# Altium PCB Probe.PcbDoc (part 1 of 2)
Units mm, origin at the board's own origin, x right, y up, seen from the top; angles counter-clockwise.
Board outline 70 x 20 mm, 4 copper layers (Top, Ground, Signal/Power, Bottom), stack 1.516 mm thick; 57 components, 31 nets, 156 pads, 262 vias.
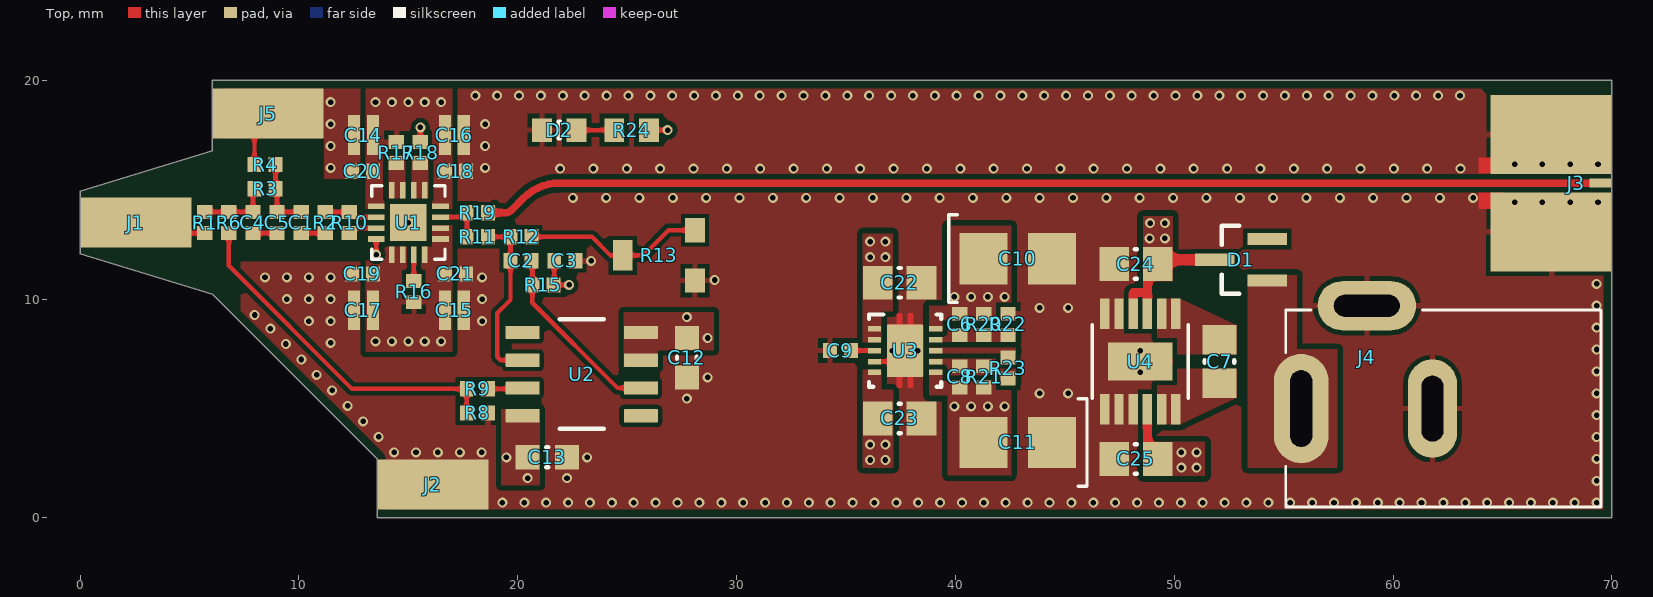
[diagram p0: Top view]
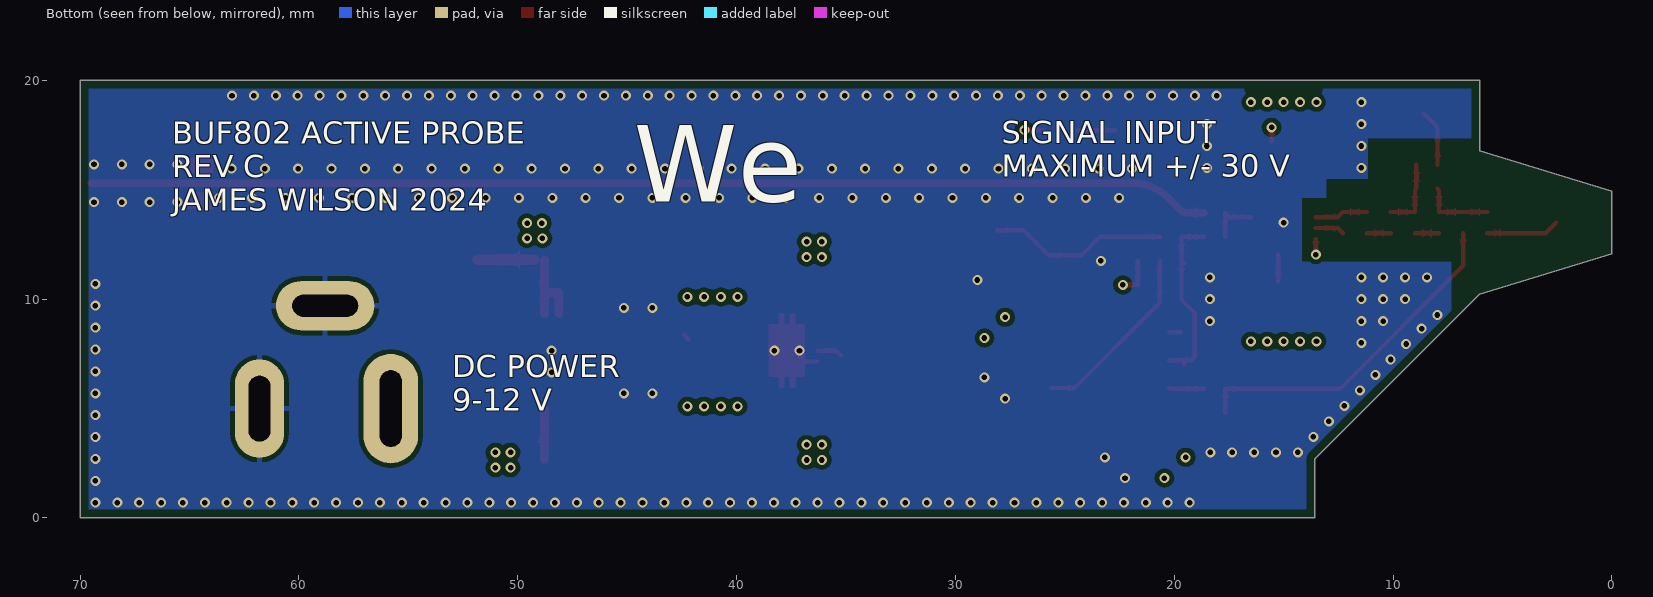
[diagram p1: Bottom view, seen from below]
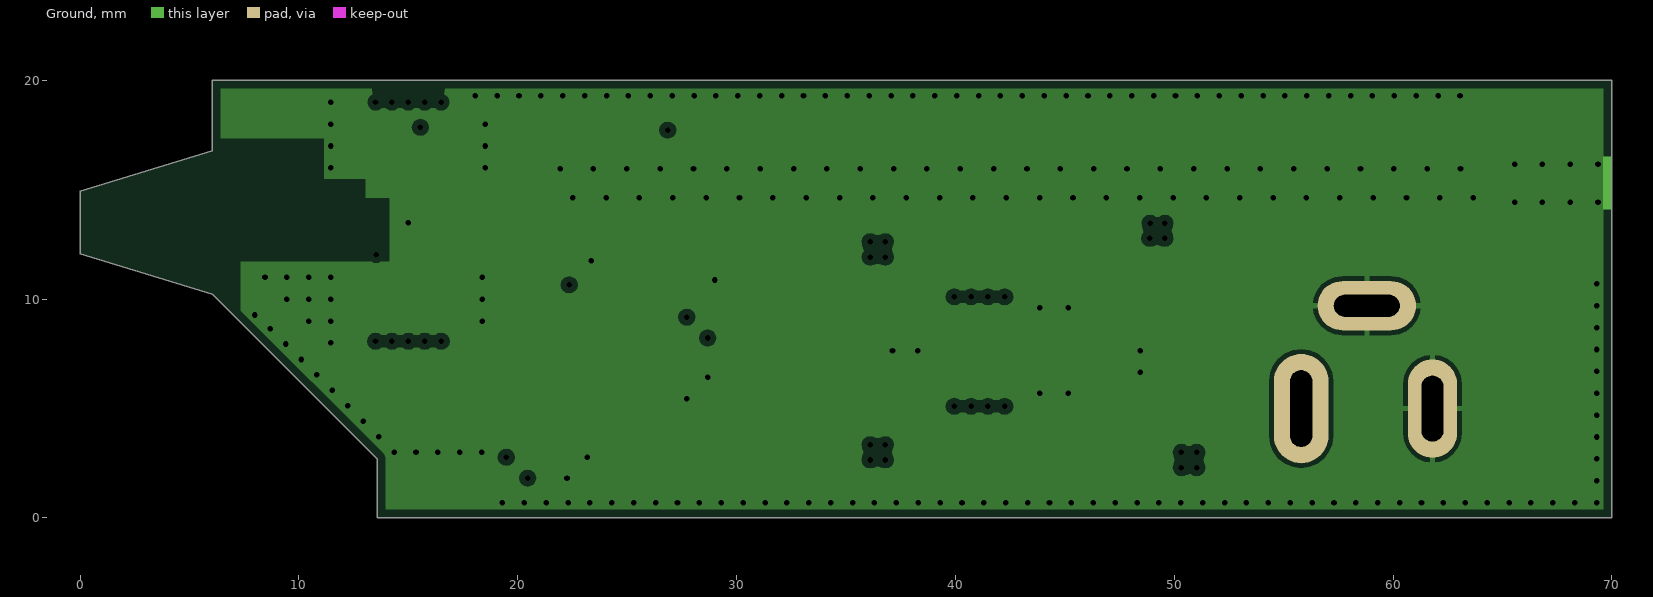
[diagram p2: Ground]
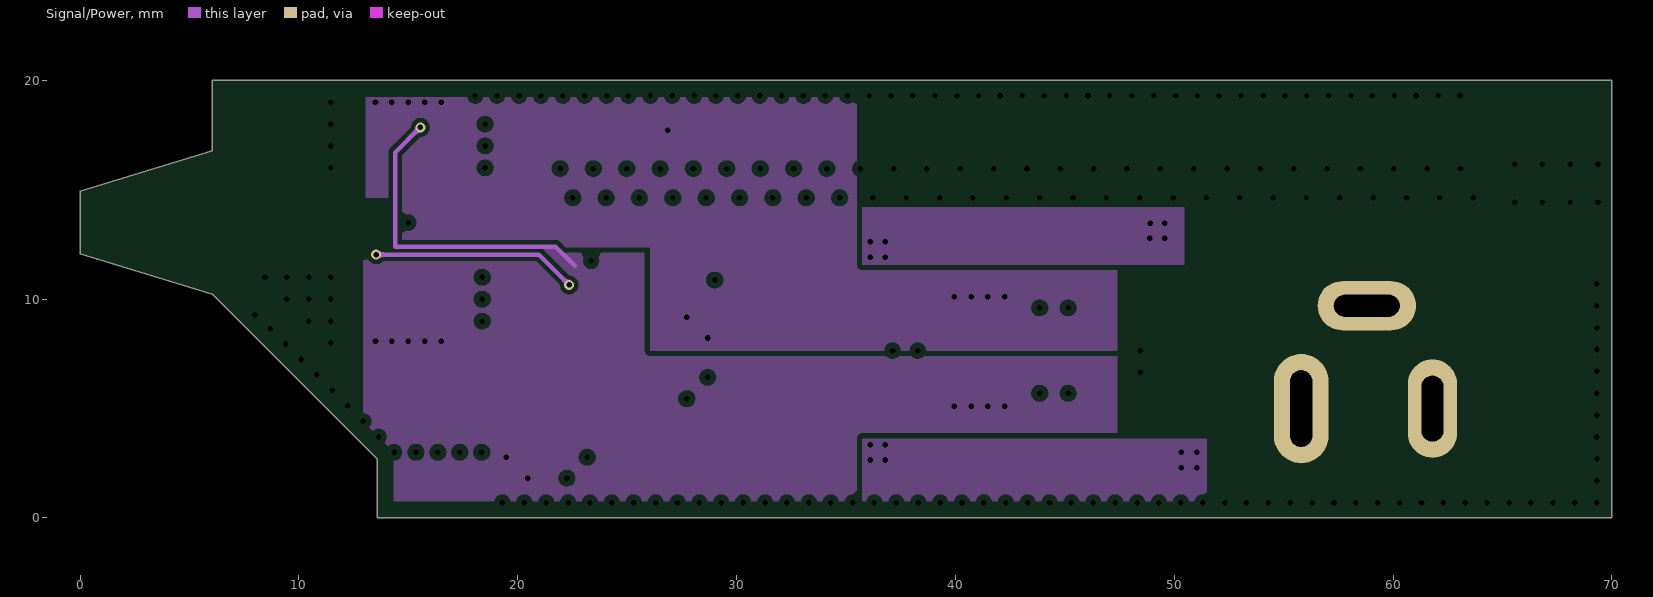
[diagram p3: Signal/Power]
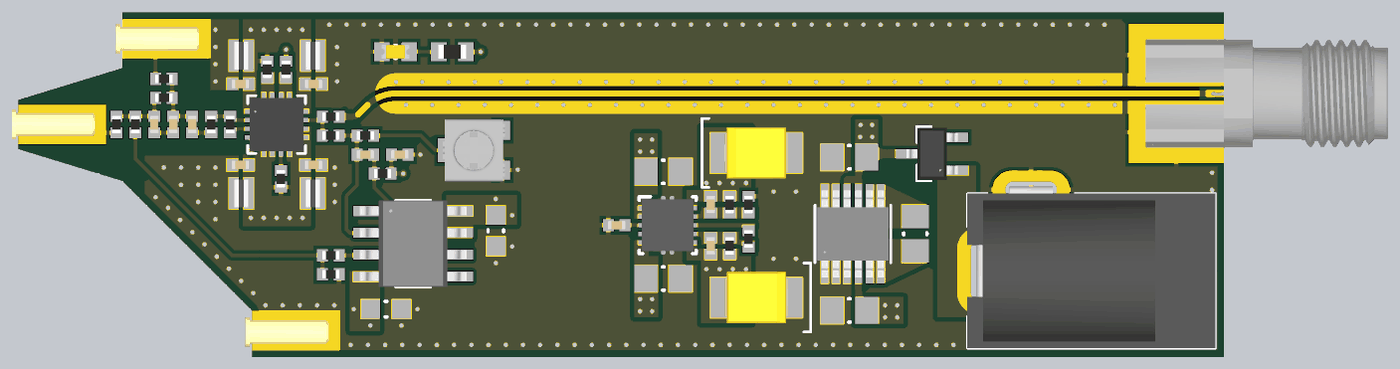
[diagram p4: 3D render of the assembled board from above, using the file's embedded part models]

## Layer stack, top to bottom
Top Solder: solder mask 0.0254, Solder Resist, Dk 3.5
Top: signal copper 0.0432
Dielectric 1: core 0.2022, FR-4, Dk 3.68
Ground: signal copper 0.0173
Dielectric 3: core 0.9906, Dk 3.68
Signal/Power: signal copper 0.0173
Dielectric 4: prepreg 0.2022, Dk 3.68
Bottom: signal copper 0.0432
Bottom Solder: solder mask 0.0254, Solder Resist, Dk 3.5

## Board outline
0,12.077 0,14.923 6.05,16.775 6.05,20 70,20 70,0 13.575,0 13.575,2.7 6.05,10.225

## Design rules (kind name [scope] priority, off if disabled: settings)
BoardOutlineClearance BoardOutlineClearance_outer [OnCopper and OnOutside] p1: gap=0.381 ignorepadtopadclearanceinfootprint=FALSE except(0: SMDPad-OutlineEdge)
BoardOutlineClearance BoardOutlineClearance_L3 [OnLayer('Signal/Power')] p2: gap=0.762 ignorepadtopadclearanceinfootprint=FALSE
BoardOutlineClearance BoardOutlineClearance_inner [OnCopper and not OnOutside] p3: gap=0.381 ignorepadtopadclearanceinfootprint=FALSE except(0: Fill-OutlineEdge Region-OutlineEdge)
Clearance Clearance_RF_CPWG [InNet('OUT') vs InNet('GND')] p1: gap=0.152 ignorepadtopadclearanceinfootprint=FALSE except(0.254: Arc-Fill Arc-Poly Arc-Region Track-Fill Track-Poly Track-Region Fill-Fill Fill-Poly Fill-Region Poly-Poly Poly-Region Region-Region)
Clearance [All] p2: gap=0.152 ignorepadtopadclearanceinfootprint=FALSE except(0.203: Arc-Poly Track-Poly SMDPad-Poly THPad-Poly Via-Poly; 0.254: Arc-Hole Track-Hole SMDPad-Hole THPad-Hole Via-Hole Fill-Fill Fill-Poly Fill-Region Fill-Hole Poly-Poly Poly-Hole Region-Hole)
HoleSize [All] p1: absolutevalues=TRUE maxlimit=6.35 minlimit=0.254 maxpercent=80.000 minpercent=20.000
MinimumSolderMaskSliver [All] p1: minsoldermaskwidth=0.102
PlaneConnect [All] p1: planeconnectstyle=Direct reliefexpansion=0.508 reliefentries=4 reliefconductorwidth=0.254 reliefairgap=0.254
PolygonConnect PolygonConnect_Relief [InComponentClass('Power plane relief') vs InNet('GND') OR InNet('VEE') OR InNet('VCC')] p1: connectstyle=Relief reliefconductorwidth=0.254 reliefentries=4 polygonreliefangle="90 Angle" airgapwidth=0.203
PolygonConnect [All] p2: connectstyle=Direct reliefconductorwidth=0.254 reliefentries=4 polygonreliefangle="90 Angle" airgapwidth=0.254
RoutingVias [All] p1: holewidth=0.457 width=0.457 viastyle="Through Hole" minholewidth=0.203 minwidth=0.457 maxholewidth=0.711 maxwidth=1.27
SilkToSolderMaskClearance [IsPad] p1: minsilkscreentomaskgap=0.127 clearancetoexposedcopper=TRUE
SolderMaskExpansion [All] p1: expansion=0.051
Width [All] p1: maxlimit=5.08 minlimit=0.102 preferedwidth=0.254
26 further rules are at their usual default settings.

## Classes and differential pairs
component class "Power plane relief": C3 C9 D2 J3 J4 R8 R13 R16 R17 R18 R22
net class Power: GND V+ V- VCC VEE
component class Power: C6 C7 C8 C9 C10 C11 C12 C13 C14 C15 C16 C17 C18 C19 C20 C21 C22 C23 C24 C25 D1 D2 J4 R20 R21 R22 R23 R24 U3 U4
component class Probe: C1 C2 C3 C4 C5 J1 J2 J3 J5 R1 R2 R3 R4 R6 R8 R9 R10 R11 R12 R13 R15 R16 R17 R18 R19 U1 U2

## Components (designator, comment, footprint, x,y, rotation, side; value= is the part's Value field where it differs from the comment)
C1 "330p" CAPC0402(1005)50_M 10.1,13.5 r270 top
C2 "47p" CAPC0402(1005)50_M 20.15,11.75 r0 top
C3 "100p" CAPC0402(1005)50_M 22.15,11.75 r0 top
C4 "1.1p" CAPC0402(1005)50_M 7.9,13.5 r270 top
C5 "1.3p" CAPC0402(1005)50_M 9,13.5 r90 top
C6 "10n" CAPC0402(1005)50_M 40.2,8.85 r90 top
C7 "1u" CAPC0805(2012)145_M 52.075,7.15 r270 top
C8 "10n" CAPC0402(1005)50_M 40.2,6.45 r270 top
C9 "10n" CAPC0402(1005)50_M 34.742,7.65 r180 top
C10 "22u" "KEMET B_M" 42.85,11.85 r180 top
C11 "22u" "KEMET B_M" 42.85,3.45 r0 top
C12 "100n" CAPC0603(1608)100_M 27.725,7.325 r270 top
C13 "100n" CAPC0603(1608)100_M 21.35,2.775 r180 top
C14 "100n LICC" CAPC0306_M 12.95,17.5 r180 top
C15 "100n LICC" CAPC0306_M 17.1,9.5 r180 top
C16 "100n LICC" CAPC0306_M 17.1,17.5 r0 top
C17 "100n LICC" CAPC0306_M 12.95,9.5 r0 top
C18 "10n" CAPC0402(1005)50_M 17.15,15.85 r0 top
C19 "10n" CAPC0402(1005)50_M 12.9,11.15 r0 top
C20 "10n" CAPC0402(1005)50_M 12.9,15.85 r180 top
C21 "10n" CAPC0402(1005)50_M 17.15,11.15 r180 top
C22 "4.7u" CAPC0805(2012)100_M 37.45,10.75 r0 top
C23 "4.7u" CAPC0805(2012)100_M 37.45,4.55 r180 top
C24 "4.7u" CAPC0805(2012)100_M 48.25,11.6 r180 top
C25 "4.7u" CAPC0805(2012)100_M 48.25,2.7 r180 top
D1 "BAT54" INF-PG-SC59_M 53.05,11.8 r180 top
D2 "VLMTG1300-GS08" LED0603(1608)_M 21.9,17.725 r0 top
J1 "0339-0-15-01-15-27-10-0" "MILL-MAX 0339"#1 0,13.5 r0 top
J2 "0339-0-15-01-15-27-10-0" "MILL-MAX 0339"#2 13.575,1.45 r0 top
J3 "901-10511-3" 901-10511-3 70,15.3 r180 top
J4 "2.1/5.5mm" "CUI PJ-002A" 55.8,5 r0 top
J5 "0339-0-15-01-15-27-10-0" "MILL-MAX 0339"#1 6.05,18.476 r0 top
R1 "100" RESC0402(1005)_M 5.7,13.5 r90 top
R2 "0" RESC0402(1005)_M 11.2,13.5 r90 top
R3 "1.60M" RESC0402(1005)_M 8.45,15.05 r0 top
R4 "422K" RESC0402(1005)_M 8.45,16.15 r180 top
R6 "1.91M" RESC0402(1005)_M 6.8,13.5 r270 top
R8 "66.5k" RESC0402(1005)_M 18.15,4.8 r0 top value=66.5K
R9 "68" RESC0402(1005)_M 18.15,5.9 r0 top
R10 "10.0M" RESC0402(1005)_M 12.3,13.5 r270 top
R11 "51.0K" RESC0402(1005)_M 18.15,12.85 r180 top
R12 "10.0K" RESC0402(1005)_M 20.15,12.85 r0 top
R13 "1k" PVG3A 26.45,12 r90 top
R15 "5.60K" RESC0402(1005)_M 21.15,10.65 r180 top
R16 "17.8k" RESC0402(1005)_M 15.25,10.342 r270 top value=17.8K
R17 "1.00K" RESC0402(1005)_M 14.45,16.7 r90 top
R18 "1.00K" RESC0402(1005)_M 15.55,16.7 r90 top
R19 "49.9" RESC0402(1005)_M 18.15,13.95 r0 top
R20 "41.2k" RESC0402(1005)_M 41.3,8.85 r270 top value=41.2K
R21 "91.0K" RESC0402(1005)_M 41.3,6.45 r270 top
R22 "10.2k" RESC0402(1005)_M 42.4,8.85 r90 top value=10.2K
R23 "18.0K" RESC0402(1005)_M 42.4,6.85 r90 top
R24 "4.70K" RESC0603(1608)_M 25.2,17.725 r180 top
U1 "BUF802" "VQFN16_RGT_TEX- OSHPARK" 15,13.5 r0 top
U2 "OPA140" SOIC-8 22.925,6.575 r0 top
U3 "TPS7A39" DSC0010J_NV 37.7,7.65 r0 top
U4 "LTC3261" MSOP-12_MSE 48.45,7.15 r90 top

## Footprints (in the part's own frame and the unit in brackets; to place one, negate y for a bottom-side part, rotate by r counter-clockwise, add the part's x,y. Pads: shape width x height; smd on the part's side, far side on the other; paste and mask are expansions set on the pad)
901-10511-3 [mil] "901-10511-3"
  rect 40x16 smd paste-1000: 1(20,0)
  rect 218x142 smd paste-1000: 2(109,87.79) 2(109,-87.75)
  body extent -375,-124 179,124, height 127
CAPC0306_M [mm] "CAPC0306(0510)_M"
  rect 0.56x1.81 smd: 1(-0.43,0) 2(0.43,0)
  body extent -0.4,-0.8 0.4,0.8, height 0.55
CAPC0402(1005)50_M [mm] "Chip Capacitor, Body 1.0x0.5mm, Height 0.5mm, IPC Low  Density"
  rect 0.635x0.7 smd: 1(-0.483,0) 2(0.483,0)
  body extent -0.5,-0.25 0.5,0.25, height 0.5
CAPC0603(1608)100_M [mm] "Chip Capacitor, Body 1.6x0.8mm, Height 1.0mm, IPC Low Density"
  rect 1.1x1.1 smd: 1(-0.9,0) 2(0.9,0)
  silkscreen extent -0.05,-0.45 0.05,0.45, body extent -0.87,-0.48 0.88,0.48, height 1
CAPC0805(2012)100_M [mm] "Chip Capacitor, Body 2.0x1.2mm, Height 1.0mm, IPC Low Density"
  rect 1.35x1.55 smd: 1(-1,0) 2(1,0)
  silkscreen extent -0.05,-0.67 0.05,0.67, body extent -1.1,-0.72 1.1,0.72, height 1
CAPC0805(2012)145_M [mm] "Chip Capacitor, Body 2.0x1.2mm, Height 1.45mm, IPC Low Density"
  rect 1.35x1.55 smd: 1(-1,0) 2(1,0)
  silkscreen extent -0.05,-0.67 0.05,0.67, body extent -1.1,-0.72 1.1,0.72, height 1.45
"CUI PJ-002A" [mm] "CUI PJ-002A 2.1/5.5mm barrel jack"
  oval 2.5x5 hole 1 slot 3.5 at 90 deg: 1(0,0)
  oval 2.25x4.5 hole 1 slot 3 at 90 deg: 2(6,0)
  oval 4.5x2.25 hole 1 slot 3 at 0 deg: 3(3,4.7)
  silkscreen extent -0.7,-4.5 13.7,4.5, body extent -0.7,-4.5 13.7,4.9, height 11
DSC0010J_NV [mm]
  rect 0.6x0.25 smd: 1(-1.4,1) 2(-1.4,0.5) 3(-1.4,0) 4(-1.4,-0.5) 5(-1.4,-1) 6(1.4,-1) 7(1.4,-0.5) 8(1.4,0) 9(1.4,0.5) 10(1.4,1)
  rect 1.65x2.4 smd paste-1.187 mask-1.181: 11(0,0)
  Top region: -0.325,-1.7 -0.375,-1.65 -0.375,-1.2 -0.775,-1.2 -0.825,-1.15 -0.825,1.15 -0.775,1.2 -0.375,1.2 -0.375,1.65 -0.325,1.7 -0.325,1.7 -0.175,1.7 -0.175,1.7 -0.125,1.65 -0.125,1.2 0.125,1.2 0.125,1.65 0.175,1.7 0.175,1.7 0.325,1.7 0.325,1.7 0.375,1.65 0.375,1.2 0.775,1.2 0.825,1.15 0.825,-1.15 0.775,-1.2 0.375,-1.2 0.375,-1.65 0.325,-1.7 0.175,-1.7 0.125,-1.65 0.125,-1.2 -0.125,-1.2 -0.125,-1.65 -0.175,-1.7
  silkscreen extent -1.65,-1.65 1.65,1.65, body extent -1.5,-1.5 1.5,1.5, height 0.8
INF-PG-SC59_M [mm] "SOT23, 3-Leads, Body 3x1.53mm, Pitch 0.95mm, IPC Low Density"
  rect 1.8x0.55 smd: 1(-1.2,0.95) 2(-1.2,-0.95) 3(1.2,0)
  silkscreen extent 0.07,-1.55 0.88,1.55, body extent -1.5,-1.51 1.5,1.51, height 1.25
"KEMET B_M" [mm] "KEMET B lowest density"
  rect 2.21x2.35 smd: 1(1.565,0) 2(-1.565,0)
  silkscreen extent 2.76,-2 3.16,2, body extent -1.85,-1.5 1.85,1.5, height 2.1
LED0603(1608)_M [mm] "Chip Resistor, Body 1.6x0.8mm, IPC Low Density"
  rect 0.908x1.079 smd: 1(0.79,0) 2(-0.79,0)
  silkscreen extent -0.05,-0.4 0.05,0.4, body extent -0.8,-0.4 0.8,0.4, height 0.8
"MILL-MAX 0339"#1 [mil] "MILL-MAX 0339"
  rect 200x90 smd paste-1000: 1(100,0)
  body extent -15,-34 175,34, height 61
"MILL-MAX 0339"#2 [mil] "MILL-MAX 0339"
  rect 200x90 smd paste-1000: 1(100,2.91)
  body extent -15,-34 175,34, height 61
MSOP-12_MSE [mil]
  rect 55x17 smd: 1(-86,64) 2(-86,38.4) 3(-86,12.8) 4(-86,-12.8) 5(-86,-38.4) 6(-86,-64) 7(86,-64) 8(86,-38.4) 9(86,-12.8) 10(86,12.8) 11(86,38.4) 12(86,64)
  rect 69x116 smd paste-57.5: EPAD(0,0)
  silkscreen extent -66,-86 66,86, body extent -99,-81 99,81, height 43
PVG3A [mm] "SMD Sealed Type Single-Turn PVG3"
  rect 1.1x0.9 smd: 1(1.15,-1.65) 3(-1.15,-1.65)
  rect 1.4x0.9 smd: 2(0,1.65)
  body extent -1.8,-1.8 1.8,1.8, height 1.94
RESC0402(1005)_M [mm] "Chip Resistor, Body 1.0x0.5mm, IPC Low Density"
  rect 0.635x0.7 smd: 1(-0.483,0) 2(0.482,0)
  body extent -0.5,-0.25 0.5,0.25, height 0.35
RESC0603(1608)_M [mm] "Chip Resistor, Body 1.6x0.8mm, IPC Low Density"
  rect 0.908x1.079 smd: 1(-0.79,0) 2(0.79,0)
  body extent -0.8,-0.4 0.8,0.4, height 0.45
SOIC-8 [mm] "SOIC-8"
  rrect8% 1.55x0.6 smd: 1(-2.7,1.905) 2(-2.7,0.635) 3(-2.7,-0.635) 4(-2.7,-1.905) 5(2.7,-1.905) 6(2.7,-0.635) 7(2.7,0.635) 8(2.7,1.905)
  silkscreen extent -1,-2.5 1,2.5, body extent -3.1,-2.5 3.1,2.5, height 1.76
"VQFN16_RGT_TEX- OSHPARK" [mil]
  rect 30x10 smd: 1(-58,29.54) 2(-58,9.85) 3(-58,-9.85) 4(-58,-29.53) 9(58,-29.53) 10(58,-9.85) 11(58,9.85) 12(58,29.54)
  rect 10x30 smd: 5(-29.53,-58) 6(-9.85,-58) 7(9.85,-58) 8(29.54,-58) 13(29.54,58) 14(9.85,58) 15(-9.85,58) 16(-29.53,58)
  rect 66.14x66.14 smd: 17(0,0)
  silkscreen extent -66,-66 66,66, body extent -61,-61 61,61, height 39

## Part data
C1: library part GRM1555C1H331JA01, "CAP CER 330PF±5% 50V C0G 0402", Capacitance=330pF, Manufacturer=Murata, Manufacturer Part Number=GRM1555C1H331JA01D, Temperature Coefficient=C0G, Tolerance=±5%, Part Number=GRM1555C1H331JA01
C2: library part CL05C470JB5NNN, "CAP CER 47PF±5% 50V C0G 0402", Capacitance=47pF, Manufacturer="Samsung Electro-Mechanics", Manufacturer Part Number=CL05C470JB5NNNC, Temperature Coefficient=C0G, Tolerance=±5%, Voltage Rating=50V, Part Number=CL05C470JB5NNN
C3: library part CL05C101JB5NNN, "CAP CER 100PF±5% 50V C0G 0402", Capacitance=100pF, Manufacturer="Samsung Electro-Mechanics", Manufacturer Part Number=CL05C101JB5NNNC, Temperature Coefficient=C0G, Tolerance=±5%, Voltage Rating=50V, Part Number=CL05C101JB5NNN
C4: library part GJM1555C1H1R1WB01, "CAP CER 1.1PF±0.05PF 50V C0G/NP0 0402", Capacitance=1.1pF, Manufacturer=Murata, Manufacturer Part Number=GJM1555C1H1R1WB01D, Temperature Coefficient=C0G, Tolerance=±0.05pF, Part Number=GJM1555C1H1R1WB01
C5: library part GJM1555C1H1R3WB01, "CAP CER 1.3PF±0.05PF 50V C0G/NP0 0402", Capacitance=1.3pF, Manufacturer=Murata, Manufacturer Part Number=GJM1555C1H1R3WB01D, Temperature Coefficient=C0G, Tolerance=±0.05pF, Part Number=GJM1555C1H1R3WB01
C6 C8 C9: library part GRM1555C1E103JE01, "CAP CER 10NF±5% 25V C0G 0402", Capacitance=10nF, Manufacturer=Murata, Manufacturer Part Number=GRM1555C1E103JE01D, Temperature Coefficient=C0G, Tolerance=±5%, Part Number=GRM1555C1E103JE01
C7: library part CC0805KKX7R9BB105, "Cap Ceramic 1uF 50V X7R 10% SMD 0805 125C Blister T/R", Capacitance=1uF, Case/Package=0805, Case Code (Metric)=2012, Dielectric=X7R, Manufacturer=Yageo, Max Operating Temperature=125°C, Min Operating Temperature=-55°C, Supplier Part Number 1=311-1886-1-ND, Tolerance=10%, Voltage Rating=50V, Case Code (Imperial)=0805, ComponentLink1Description=http://www.mouser.com/ds/2/447/Yageo_UPY-GP_NP0_16V-to-50V_9-358835.pdf?src-supplier=Mouser, ComponentLink1URL=http://www.mouser.com/ds/2/447/Yageo_UPY-GP_NP0_16V-to-50V_9-358835.pdf?src-supplier=Mouser, Composition=Ceramic, Depth=1.25mm, Halogen Free="Halogen Free", Height=1.25mm, Lead Free="Lead Free", Length=2mm, Manufacturer Part Number=CC0805KKX7R9BB105, Mount="Surface Mount", Packaging="Tape and Reel", Pricing 1="1=0.27, 10=0.188, 100=0.1064, 500=0.0751, 1000=0.06571 (USD)", Radiation Hardening=No, Stock 1=558291, Supplier 1=Digi-Key, Supplier 2=Mouser, Supplier Part Number 2=603-CC805KKX7R9BB105, Termination=SMD/SMT, Thickness=0.057inch, Voltage Rating (DC)=50V, Weight=0.000194oz, Width=0.049inch
C10 C11: library part T491B226K016AT, "CAP TANT 22UF 10% 16V 1411", Capacitance=22uF, Case/Package=1411, Case Code (Metric)=3528, Dielectric Material=Tantalum, ESR (Equivalent Series Resistance)=2.2R, Leakage Current=3.6uA, Manufacturer=KEMET, Max Operating Temperature=125°C, Min Operating Temperature=-55°C, Package Quantity=1, Ripple Current=197mA, Supplier Part Number 1=399-8312-6-ND, Tolerance=10%, Voltage=16V, Case Code (Imperial)=1411, ComponentLink1Description=https://datasheet.ciiva.com/8079/kem-t2005-t491-8079799.pdf?src-supplier=Element14, ComponentLink1URL=https://datasheet.ciiva.com/8079/kem-t2005-t491-8079799.pdf?src-supplier=Element14, ComponentLink2Description=https://datasheet.ciiva.com/7696/1854511-7696325.pdf?src-supplier=Element14, ComponentLink2URL=https://datasheet.ciiva.com/7696/1854511-7696325.pdf?src-supplier=Element14, ComponentLink3Description=https://datasheet.ciiva.com/7696/1446014-7696326.pdf?src-supplier=Element14, ComponentLink3URL=https://datasheet.ciiva.com/7696/1446014-7696326.pdf?src-supplier=Element14, ComponentLink4Description=https://datasheet.ciiva.com/5934/1446014-5934574.pdf?src-supplier=Farnell, ComponentLink4URL=https://datasheet.ciiva.com/5934/1446014-5934574.pdf?src-supplier=Farnell, ComponentLink5Description=https://datasheet.ciiva.com/6247/kem-t2005-t491-6247978.pdf?src-supplier=Digikey, ComponentLink5URL=https://datasheet.ciiva.com/6247/kem-t2005-t491-6247978.pdf?src-supplier=Digikey, ComponentLink6Description=https://datasheet.ciiva.com/6247/kem-t2005-t491-6247977.pdf?src-supplier=Digikey, ComponentLink6URL=https://datasheet.ciiva.com/6247/kem-t2005-t491-6247977.pdf?src-supplier=Digikey, ComponentLink7Description=https://datasheet.ciiva.com/6247/kem-t2005-t491-6247979.pdf?src-supplier=Digikey, ComponentLink7URL=https://datasheet.ciiva.com/6247/kem-t2005-t491-6247979.pdf?src-supplier=Digikey, ComponentLink8Description=https://datasheet.ciiva.com/14589/70095774-14589317.pdf?src-supplier=Allied+Electronics, ComponentLink8URL=https://datasheet.ciiva.com/14589/70095774-14589317.pdf?src-supplier=Allied+Electronics, ComponentLink9Description=https://datasheet.ciiva.com/14600/70095774-14600348.pdf?src-supplier=Allied+Electronics, ComponentLink9URL=https://datasheet.ciiva.com/14600/70095774-14600348.pdf?src-supplier=Allied+Electronics, ComponentLink10Description=https://datasheet.ciiva.com/12911/kem-t2005-t491-12911727.pdf?src-supplier=Mouser, ComponentLink10URL=https://datasheet.ciiva.com/12911/kem-t2005-t491-12911727.pdf?src-supplier=Mouser, ComponentLink11Description=https://datasheet.ciiva.com/29244/458294-da-01-en-tantal-kondensator-t491b226k016at-29244581.pdf?src-supplier=Conrad, ComponentLink11URL=https://datasheet.ciiva.com/29244/458294-da-01-en-tantal-kondensator-t491b226k016at-29244581.pdf?src-supplier=Conrad, Construction=Flat, Depth=2.8mm, Dissipation Factor=6%, Failure Rate=0.001%, Features="General Purpose", Height=1.9mm, Height - Seated (Max)=0.083inch, Lead Free="Lead Free", Lead Pitch=1.9mm, Length=3.5mm, Life (Hours)=2000Hour, Manufacturer Part Number=T491B226K016AT, Mount="Surface Mount,PCB", Number of Pins=2, Packaging="Tape and Reel", Polarity=Polar, Pricing 1="1=0.64, 10=0.433, 50=0.3444, 100=0.2844, 500=0.2222, 1000=0.18887 (USD)", Radiation Hardening=No, Reach SVHC Compliant=Yes, RoHS Compliant=Yes, Series=T491, Stock 1=3174, Supplier 1=Digikey, Supplier 2=Mouser, Supplier Part Number 2=80-T491B226K016, Termination=SMD/SMT, Voltage Rating=16V, Voltage Rating (DC)=16V, Weight=0.002293oz, Width=2.8mm
C12 C13: library part CC0603KRX7R9BB104, "CAPACITOR CERAMIC, 0.1UF, 50V, X7R, 10%, 0603", Capacitance=100nF, Case/Package=0603, Case Code (Metric)=1608, Dielectric=X7R, Dielectric Material=Ceramic, LCSC PART #=C14663, Manufacturer=Yageo, Max Operating Temperature=125°C, Min Operating Temperature=-55°C, Package Quantity=1, Supplier Part Number 1=311-1344-1-ND, Tolerance=10%, Voltage=50V, Case Code (Imperial)=0603, ComponentLink1Description=http://www.yageo.com/documents/recent/UPY-GPHC_X7R_6.3V-to-50V_18.pdf?src-supplier=Digi-Key, ComponentLink1URL=http://www.yageo.com/documents/recent/UPY-GPHC_X7R_6.3V-to-50V_18.pdf?src-supplier=Digi-Key, ComponentLink2Description=http://www.farnell.com/datasheets/1489800.pdf?src-supplier=Element14, ComponentLink2URL=http://www.farnell.com/datasheets/1489800.pdf?src-supplier=Element14, ComponentLink3Description=http://www.yageo.com/documents/recent/UPY-GPHC_X7R_6.3V-to-50V_8.pdf?src-supplier=Avnet+Europe, ComponentLink3URL=http://www.yageo.com/documents/recent/UPY-GPHC_X7R_6.3V-to-50V_8.pdf?src-supplier=Avnet+Europe, ComponentLink4Description=http://www.farnell.com/datasheets/2167236.pdf?src-supplier=Element14, ComponentLink4URL=http://www.farnell.com/datasheets/2167236.pdf?src-supplier=Element14, ComponentLink5Description=http://www.farnell.com/datasheets/1489800.pdf?src-supplier=Farnell, ComponentLink5URL=http://www.farnell.com/datasheets/1489800.pdf?src-supplier=Farnell, Depth=0.8mm, Halogen Free="Halogen Free", Height=0.8mm, Lead Free="Lead Free", Length=1.6mm, Manufacturer Part Number=CC0603KRX7R9BB104, Mount="Surface Mount", Number of Pins=2, Packaging="Tape and Reel", Pricing 1="1=0.1, 10=0.066, 50=0.036, 100=0.0293, 500=0.02094, 1000=0.01646 (USD)", Radiation Hardening=No, REACH SVHC="No SVHC", Stock 1=0, Supplier 1=Digi-Key, Supplier 2=Mouser, Supplier Part Number 2=603-CC603KRX7R9BB104, Termination=SMD/SMT, Thickness=0.035inch, Voltage Rating=50V, Width=0.031inch
C14 C15 C16 C17: library part TWK107B7104MVHT, "CAP CER 0.1UF 25V X7R 0306", Capacitance=100nF, Case/Package=0306, Case Code (Metric)=0816, Manufacturer="Taiyo Yuden", Max Operating Temperature=125°C, Min Operating Temperature=-55°C, Ratings=AEC-Q200, Supplier Part Number 1=587-6181-1-ND, Tolerance=20%, Voltage Rating=25V, Case Code (Imperial)=0306, ComponentLink1Description=http://ds.yuden.co.jp/TYCOMPAS/ut/detail.do?productNo=TWK107B7104MVHT&amp;fileName=TWK107B7104MVHT_SS&amp;mode=specSheetDownload&src-supplier=Digi-Key, ComponentLink1URL=http://ds.yuden.co.jp/TYCOMPAS/ut/detail.do?productNo=TWK107B7104MVHT&amp;fileName=TWK107B7104MVHT_SS&amp;mode=specSheetDownload&src-supplier=Digi-Key, ComponentLink2Description="https://ds.yuden.co.jp/TYCOMPAS/ut/detail?pn=TWK107B7104MVHT &amp;u=M&src-supplier=Digi-Key", ComponentLink2URL="https://ds.yuden.co.jp/TYCOMPAS/ut/detail?pn=TWK107B7104MVHT &amp;u=M&src-supplier=Digi-Key", Manufacturer Part Number=TWK107B7104MVHT, Mount="Surface Mount", Packaging="Tape and Reel", Pricing 1="1=0.31, 10=0.219, 50=0.153, 100=0.1312, 500=0.0984, 1000=0.08309 (USD)", RoHS Compliant=Yes, Stock 1=9611, Supplier 1=Digi-Key, Supplier 2=Mouser, Supplier Part Number 2=963-TWK107B7104MVHT
C18 C19 C20 C21: library part GRM155R71H103KA88, "CAP CER 10NF±10% 50V X7R 0402", Capacitance=10nF, Manufacturer=Murata, Manufacturer Part Number=GRM155R71H103KA88D, Temperature Coefficient=X7R, Tolerance=±10%, Part Number=GRM155R71H103KA88
C22 C23 C24 C25: library part GRM21BZ71H475KE15K, "CAP CER 4.7UF 50V X7R 0805", Manufacturer=Murata, Supplier Part Number 1=490-GRM21BZ71H475KE15KCT-ND, ComponentLink1Description=https://datasheet.octopart.com/GRM21BZ71H475KE15K-Murata-datasheet-149523520.pdf?src-supplier=Newark, ComponentLink1URL=https://datasheet.octopart.com/GRM21BZ71H475KE15K-Murata-datasheet-149523520.pdf?src-supplier=Newark, ComponentLink2Description=https://datasheet.octopart.com/GRM21BZ71H475KE15K-Murata-datasheet-165579666.pdf?src-supplier=TME, ComponentLink2URL=https://datasheet.octopart.com/GRM21BZ71H475KE15K-Murata-datasheet-165579666.pdf?src-supplier=TME, Manufacturer Part Number=GRM21BZ71H475KE15K, Pricing 1="1=0.6, 10=0.444, 50=0.3554, 100=0.3047, 500=0.2412, 1000=0.20311, 2500=0.19042, 5000=0.17772 (USD)", RoHS Compliant=Yes, Stock 1=134344, Supplier 1=Digi-Key, Supplier 2=Mouser, Supplier Part Number 2=81-GRM21BZ71H475KE5K
D1: "DIODE SCHOTTKY 30V 200MA TO236AB", Manufacturer="Nexperia USA", Manufacturer Part Number=BAT54,215, Supplier Part Number 1=1727-2900-6-ND, Stock 1=0, Supplier 1=Digi-Key
D2: "LED GREEN 0603 SMD", Case/Package=0603, Case Code (Metric)=1608, Color=Green, Forward Current=20mA, Forward Voltage=3.2V, Manufacturer="Vishay Semiconductors", Max Operating Temperature=85°C, Max Power Dissipation=76mW, Min Operating Temperature=-35°C, Package Quantity=1, Power Rating=75mW, Supplier Part Number 1=VLMTG1300-GS08CT-ND, Case Code (Imperial)=0603, ComponentLink1Description=https://datasheet.ciiva.com/26322/vlmo1300-26322149.pdf?src-supplier=Element14, ComponentLink1URL=https://datasheet.ciiva.com/26322/vlmo1300-26322149.pdf?src-supplier=Element14, ComponentLink2Description=https://datasheet.ciiva.com/8028/vlmo1300-8028077.pdf?src-supplier=Element14, ComponentLink2URL=https://datasheet.ciiva.com/8028/vlmo1300-8028077.pdf?src-supplier=Element14, ComponentLink3Description=https://datasheet.ciiva.com/16510/vlmo1300-16510989.pdf?src-supplier=Future+Electronics, ComponentLink3URL=https://datasheet.ciiva.com/16510/vlmo1300-16510989.pdf?src-supplier=Future+Electronics, ComponentLink4Description=https://datasheet.ciiva.com/2115/vlmo1300-2115107.pdf?src-supplier=Digi-Key, ComponentLink4URL=https://datasheet.ciiva.com/2115/vlmo1300-2115107.pdf?src-supplier=Digi-Key, ComponentLink5Description=https://datasheet.ciiva.com/2115/vlmo1300-2115108.pdf?src-supplier=Digi-Key, ComponentLink5URL=https://datasheet.ciiva.com/2115/vlmo1300-2115108.pdf?src-supplier=Digi-Key, ComponentLink6Description=https://datasheet.ciiva.com/2115/vlmo1300-2115106.pdf?src-supplier=Digi-Key, ComponentLink6URL=https://datasheet.ciiva.com/2115/vlmo1300-2115106.pdf?src-supplier=Digi-Key, Contact Plating=Tin,Matte, Depth=0.8mm, Dominant Wavelength=525nm, Height=0.8mm, Illumination Color=Green, Lead Free="Lead Free", Length=1.6mm, Lens Style=Rectangular,Clear, Luminous Intensity=450mcd, Manufacturer Part Number=VLMTG1300-GS08, Mount="Surface Mount", Number of Elements=1, Number of LEDs=1, Number of Pins=2, Packaging="Tape and Reel", Power Dissipation=76mW, Pricing 1="1=0.46, 10=0.305, 100=0.2033, 500=0.1406, 1000=0.11716 (USD)", Radiation Hardening=No, RoHS Compliant=Yes, Series=CHipLED, Stock 1=156996, Supplier 1=Digi-Key, Supplier 2=Mouser, Supplier Part Number 2=78-VLMTG1300-GS08, Test Current=20mA, Viewing Angle=130°, Wavelength=525nm, Width=0.8mm
J1 J2 J5: "CONN PIN RCPT", Manufacturer=Mill-Max, Max Operating Temperature=125°C, Min Operating Temperature=-55°C, Supplier Part Number 1=0339-0-15-01-15-27-10-0-ND, ComponentLink1Description=https://www.mill-max.com/assets/pdfs/172.pdf?src-supplier=Digi-Key, ComponentLink1URL=https://www.mill-max.com/assets/pdfs/172.pdf?src-supplier=Digi-Key, ComponentLink2Description=https://datasheet.octopart.com/0339-0-15-01-15-27-10-0-Mill-Max-datasheet-26446830.pdf?src-supplier=Future+Electronics, ComponentLink2URL=https://datasheet.octopart.com/0339-0-15-01-15-27-10-0-Mill-Max-datasheet-26446830.pdf?src-supplier=Future+Electronics, ComponentLink3Description=http://www.mouser.com/ds/2/273/172M-276194.pdf?src-supplier=Mouser, ComponentLink3URL=http://www.mouser.com/ds/2/273/172M-276194.pdf?src-supplier=Mouser, ComponentLink4Description=https://datasheet.octopart.com/0339-0-15-01-15-27-10-0-Mill-Max-datasheet-155663258.pdf?src-supplier=Sager+Electronics, ComponentLink4URL=https://datasheet.octopart.com/0339-0-15-01-15-27-10-0-Mill-Max-datasheet-155663258.pdf?src-supplier=Sager+Electronics, Contact Material=Copper, Contact Plating=Gold, Manufacturer Part Number=0339-0-15-01-15-27-10-0, Packaging=Bulk, Pricing 1="1=1.42, 10=1.234, 25=1.1812, 50=1.155, 100=1.1025, 250=0.99748, 500=0.91874, 1000=0.7875, 2500=0.735 (USD)", RoHS Compliant=No, Series=0339, Stock 1=989, Supplier 1=Digi-Key, Supplier 2=Mouser, Supplier Part Number 2=575-0339015011527100, Termination=Solder
J3: "CONN SMA JACK STR 50OHM EDGE MNT", Case/Package=SMA, Manufacturer="Amphenol RF", Max Frequency=26.5GHz, Max Operating Temperature=165°C, Min Operating Temperature=-65°C, Supplier Part Number 1=ARF2500-ND, Voltage Rating=170V, ComponentLink1Description=https://datasheet.octopart.com/901-10511-3-Amphenol-RF-datasheet-67291285.pdf?src-supplier=Element14, ComponentLink1URL=https://datasheet.octopart.com/901-10511-3-Amphenol-RF-datasheet-67291285.pdf?src-supplier=Element14, ComponentLink2Description=https://datasheet.octopart.com/901-10511-3-Amphenol-RF-datasheet-67291280.pdf?src-supplier=Newark, ComponentLink2URL=https://datasheet.octopart.com/901-10511-3-Amphenol-RF-datasheet-67291280.pdf?src-supplier=Newark, ComponentLink3Description=http://www.amphenolrf.com/media/downloads/7776/C901-10511-3.pdf?src-supplier=Digi-Key, ComponentLink3URL=http://www.amphenolrf.com/media/downloads/7776/C901-10511-3.pdf?src-supplier=Digi-Key, Connector Type=SMA, Contact Material=Copper, Fastening Type=Threaded, Impedance=50R, Manufacturer Part Number=901-10511-3, Mount=Edge,Board, Packaging=Bulk, Pricing 1="1=9.78, 10=8.804, 25=8.2936, 50=8.081, 100=7.8684, 250=7.01772, 500=6.59242, 1000=5.82685 (USD)", RoHS Compliant=Yes, Series=-, Stock 1=1568, Supplier 1=Digi-Key, Supplier 2=Mouser, Supplier Part Number 2=523-901-10511-3, Termination=Solder
J4: library part PJ-002A, "CONN PWR JACK 2X5.5MM SOLDER", Color=Black, Current Rating=2.5A, Flammability Rating="UL94 V-0", Insulation Resistance=50MR, Manufacturer=CUI, Max Operating Temperature=85°C, Min Operating Temperature=-25°C, Package Quantity=500, Supplier Part Number 1=CP-002A-ND, Voltage Rating=24V, Connector Type=Jack, Contact Gender=Male, Contact Material="Copper Alloy,Copper", Contact Plating=Tin,Nickel, Diameter=2.1mm, Gender=Male, Housing Color=Black, Housing Material=Thermoplastic, Lead Free="Lead Free", Manufacturer Part Number=PJ-002A, Mount="Through Hole", Number of Conductors=2, Orientation=Horizontal, Packaging=Bulk, Pricing 1="1=0.6, 10=0.558, 25=0.5024, 50=0.4464, 100=0.4278, 250=0.3906, 500=0.372, 1000=0.3069, 2500=0.279 (USD)", Shielding=Unshielded, Stock 1=60290, Supplier 1=Digi-Key, Supplier 2=Mouser, Supplier Part Number 2=490-PJ-002A, Termination="Through Hole"
R1: library part RESC0402-100R-1pct, "RES 100 OHM 1% 1/16W 0402", Manufacturer 1=Yageo, Manufacturer 2="Stackpole Electronics", Manufacturer 3="Vishay Dale", Manufacturer 4="Panasonic Electronic Components", Manufacturer Part Number 1=RC0402FR-07100RL, Manufacturer Part Number 2=RMCF0402FT100R, Manufacturer Part Number 3=CRCW0402100RFKED, Manufacturer Part Number 4=ERJ-2RKF1000X, Ohms=100, Part Number=RESC0402-100R-1pct
R2: library part R0402-0R0-JMP, "RES 0 OHM JUMPER 0402", Manufacturer 1=Yageo, Manufacturer 2="Stackpole Electronics", Manufacturer 3="Vishay Dale", Manufacturer 4="Panasonic Electronic Components", Manufacturer Part Number 1=RC0402FR-071RL, Manufacturer Part Number 2=RMCF0402FT1R00, Manufacturer Part Number 3=CRCW04021R00FNED, Manufacturer Part Number 4=ERJ-2GE0R00X, Ohms=0, Part Number=R0402-0R0-JMP
R3: library part RESC0402-1M60-1pct, "RES 1.60M OHM 1% 1/16W 0402", Manufacturer 1=Yageo, Manufacturer 2="Stackpole Electronics", Manufacturer 3="Vishay Dale", Manufacturer 4="Panasonic Electronic Components", Manufacturer Part Number 1=RC0402FR-071M6L, Manufacturer Part Number 2=RMCF0402FT1M60, Manufacturer Part Number 3=CRCW04021M60FKED, Ohms=1600000, Part Number=RESC0402-1M60-1pct
R4: library part RESC0402-422K-1pct, "RES 422K OHM 1% 1/16W 0402", Manufacturer 1=Yageo, Manufacturer 2="Stackpole Electronics", Manufacturer 3="Vishay Dale", Manufacturer 4="Panasonic Electronic Components", Manufacturer Part Number 1=RC0402FR-07422KL, Manufacturer Part Number 2=RMCF0402FT422K, Manufacturer Part Number 3=CRCW0402422KFKED, Manufacturer Part Number 4=ERJ-2RKF4223X, Ohms=422000, Part Number=RESC0402-422K-1pct
R6: library part RESC0402-1M91-1pct, "RES 1.91M OHM 1% 1/16W 0402", Manufacturer 1=Yageo, Manufacturer 2="Stackpole Electronics", Manufacturer 3="Vishay Dale", Manufacturer 4="Panasonic Electronic Components", Manufacturer Part Number 1=RC0402FR-071M91L, Manufacturer Part Number 2=RMCF0402FT1M91, Manufacturer Part Number 3=CRCW04021M91FKED, Ohms=1910000, Part Number=RESC0402-1M91-1pct
R8: library part RESC0402-66K5-1pct, "RES 66.5K OHM 1% 1/16W 0402", Manufacturer 1=Yageo, Manufacturer 2="Stackpole Electronics", Manufacturer 3="Vishay Dale", Manufacturer 4="Panasonic Electronic Components", Manufacturer Part Number 1=RC0402FR-0766K5L, Manufacturer Part Number 2=RMCF0402FT66K5, Manufacturer Part Number 3=CRCW040266K5FKED, Manufacturer Part Number 4=ERJ-2RKF6652X, Ohms=66500, Part Number=RESC0402-66K5-1pct
R9: library part RESC0402-68R0-1pct, "RES 68 OHM 1% 1/16W 0402", Manufacturer 1=Yageo, Manufacturer 2="Stackpole Electronics", Manufacturer 3="Vishay Dale", Manufacturer 4="Panasonic Electronic Components", Manufacturer Part Number 1=RC0402FR-0768RL, Manufacturer Part Number 2=RMCF0402FT68R0, Manufacturer Part Number 3=CRCW040268R0FKED, Manufacturer Part Number 4=ERJ-2RKF68R0X, Ohms=68, Part Number=RESC0402-68R0-1pct
R10: library part RESC0402-10M0-1pct, "RES 10.0M OHM 1% 1/16W 0402", Manufacturer 1=Yageo, Manufacturer 2="Stackpole Electronics", Manufacturer 3="Vishay Dale", Manufacturer 4="Panasonic Electronic Components", Manufacturer Part Number 1=RC0402FR-0710ML, Manufacturer Part Number 2=RMCF0402FT10M0, Manufacturer Part Number 3=CRCW040210M0FKED, Ohms=10000000, Part Number=RESC0402-10M0-1pct
R11: library part RESC0402-51K0-1pct, "RES 51.0K OHM 1% 1/16W 0402", Manufacturer 1=Yageo, Manufacturer 2="Stackpole Electronics", Manufacturer 3="Vishay Dale", Manufacturer 4="Panasonic Electronic Components", Manufacturer Part Number 1=RC0402FR-0751KL, Manufacturer Part Number 2=RMCF0402FT51K0, Manufacturer Part Number 3=CRCW040251K0FKED, Manufacturer Part Number 4=ERJ-2RKF5102X, Ohms=51000, Part Number=RESC0402-51K0-1pct
R12: library part RESC0402-10K0-1pct, "RES 10.0K OHM 1% 1/16W 0402", Manufacturer 1=Yageo, Manufacturer 2="Stackpole Electronics", Manufacturer 3="Vishay Dale", Manufacturer 4="Panasonic Electronic Components", Manufacturer Part Number 1=RC0402FR-0710KL, Manufacturer Part Number 2=RMCF0402FT10K0, Manufacturer Part Number 3=CRCW040210K0FKED, Manufacturer Part Number 4=ERJ-2RKF1002X, Ohms=10000, Part Number=RESC0402-10K0-1pct
R13: library part PVG3A102C01R00, "TRIMMER 1K OHM 0.25W J LEAD TOP", Manufacturer=Bourns, Max Power Dissipation=250mW, Resistance=1kR, Resistor Type=Cermet, Supplier Part Number 1=490-2643-6-ND, Temperature Coefficient=150ppm/°C, Tolerance=20%, ComponentLink1Description=https://datasheet.octopart.com/PVG3A102C01R00-Bourns-datasheet-154729832.pdf?src-supplier=Newark, ComponentLink1URL=https://datasheet.octopart.com/PVG3A102C01R00-Bourns-datasheet-154729832.pdf?src-supplier=Newark, ComponentLink2Description=https://datasheet.octopart.com/PVG3A102C01R00-Bourns-datasheet-82548162.pdf?src-supplier=Element14, ComponentLink2URL=https://datasheet.octopart.com/PVG3A102C01R00-Bourns-datasheet-82548162.pdf?src-supplier=Element14, ComponentLink3Description=https://www.bourns.com/docs/Product-Datasheets/pvg3.pdf?src-supplier=Digi-Key, ComponentLink3URL=https://www.bourns.com/docs/Product-Datasheets/pvg3.pdf?src-supplier=Digi-Key, ComponentLink4Description=http://www.bourns.com/docs/Product-Datasheets/pvg3.pdf?src-supplier=Digi-Key, ComponentLink4URL=http://www.bourns.com/docs/Product-Datasheets/pvg3.pdf?src-supplier=Digi-Key, ComponentLink5Description=https://www.mouser.com/ds/2/54/vg3-1084610.pdf?src-supplier=Mouser, ComponentLink5URL=https://www.mouser.com/ds/2/54/vg3-1084610.pdf?src-supplier=Mouser, Height=0.079inch, Manufacturer Part Number=PVG3A102C01R00, Mount="Surface Mount", Number of Turns=1, Packaging="Cut Tape", Pricing 1="1=1.44, 10=1.273, 25=1.1452, 50=1.103, 100=1.0605, 250=0.99688, 500=0.8484 (USD)", Stock 1=4867, Supplier 1=Digi-Key, Supplier 2=Mouser, Supplier Part Number 2=81-PVG3A102C01R00
R15: library part RESC0402-5K60-1pct, "RES 5.60K OHM 1% 1/16W 0402", Manufacturer 1=Yageo, Manufacturer 2="Stackpole Electronics", Manufacturer 3="Vishay Dale", Manufacturer 4="Panasonic Electronic Components", Manufacturer Part Number 1=RC0402FR-075K6L, Manufacturer Part Number 2=RMCF0402FT5K60, Manufacturer Part Number 3=CRCW04025K60FKED, Manufacturer Part Number 4=ERJ-2RKF5601X, Ohms=5600, Part Number=RESC0402-5K60-1pct
R16: library part RESC0402-17K8-1pct, "RES 17.8K OHM 1% 1/16W 0402", Manufacturer 1=Yageo, Manufacturer 2="Stackpole Electronics", Manufacturer 3="Vishay Dale", Manufacturer 4="Panasonic Electronic Components", Manufacturer Part Number 1=RC0402FR-0717K8L, Manufacturer Part Number 2=RMCF0402FT17K8, Manufacturer Part Number 3=CRCW040217K8FKED, Manufacturer Part Number 4=ERJ-2RKF1782X, Ohms=17800, Part Number=RESC0402-17K8-1pct
R17 R18: library part RESC0402-1K00-1pct, "RES 1.00K OHM 1% 1/16W 0402", Manufacturer 1=Yageo, Manufacturer 2="Stackpole Electronics", Manufacturer 3="Vishay Dale", Manufacturer 4="Panasonic Electronic Components", Manufacturer Part Number 1=RC0402FR-071KL, Manufacturer Part Number 2=RMCF0402FT1K00, Manufacturer Part Number 3=CRCW04021K00FKED, Manufacturer Part Number 4=ERJ-2RKF1001X, Ohms=1000, Part Number=RESC0402-1K00-1pct
R19: library part RESC0402-49R9-1pct, "RES 49.9 OHM 1% 1/16W 0402", Manufacturer 1=Yageo, Manufacturer 2="Stackpole Electronics", Manufacturer 3="Vishay Dale", Manufacturer 4="Panasonic Electronic Components", Manufacturer Part Number 1=RC0402FR-0749R9L, Manufacturer Part Number 2=RMCF0402FT49R9, Manufacturer Part Number 3=CRCW040249R9FKED, Manufacturer Part Number 4=ERJ-2RKF49R9X, Ohms=49.9, Part Number=RESC0402-49R9-1pct
R20: library part RESC0402-41K2-1pct, "RES 41.2K OHM 1% 1/16W 0402", Manufacturer 1=Yageo, Manufacturer 2="Stackpole Electronics", Manufacturer 3="Vishay Dale", Manufacturer 4="Panasonic Electronic Components", Manufacturer Part Number 1=RC0402FR-0741K2L, Manufacturer Part Number 2=RMCF0402FT41K2, Manufacturer Part Number 3=CRCW040241K2FKED, Manufacturer Part Number 4=ERJ-2RKF4122X, Ohms=41200, Part Number=RESC0402-41K2-1pct
R21: library part RESC0402-91K0-1pct, "RES 91.0K OHM 1% 1/16W 0402", Manufacturer 1=Yageo, Manufacturer 2="Stackpole Electronics", Manufacturer 3="Vishay Dale", Manufacturer 4="Panasonic Electronic Components", Manufacturer Part Number 1=RC0402FR-0791KL, Manufacturer Part Number 2=RMCF0402FT91K0, Manufacturer Part Number 3=CRCW040291K0FKED, Manufacturer Part Number 4=ERJ-2RKF9102X, Ohms=91000, Part Number=RESC0402-91K0-1pct
R22: library part RESC0402-10K2-1pct, "RES 10.2K OHM 1% 1/16W 0402", Manufacturer 1=Yageo, Manufacturer 2="Stackpole Electronics", Manufacturer 3="Vishay Dale", Manufacturer 4="Panasonic Electronic Components", Manufacturer Part Number 1=RC0402FR-0710K2L, Manufacturer Part Number 2=RMCF0402FT10K2, Manufacturer Part Number 3=CRCW040210K2FKED, Manufacturer Part Number 4=ERJ-2RKF1022X, Ohms=10200, Part Number=RESC0402-10K2-1pct
R23: library part RESC0402-18K0-1pct, "RES 18.0K OHM 1% 1/16W 0402", Manufacturer 1=Yageo, Manufacturer 2="Stackpole Electronics", Manufacturer 3="Vishay Dale", Manufacturer 4="Panasonic Electronic Components", Manufacturer Part Number 1=RC0402FR-0718KL, Manufacturer Part Number 2=RMCF0402FT18K0, Manufacturer Part Number 3=CRCW040218K0FKED, Manufacturer Part Number 4=ERJ-2RKF1802X, Ohms=18000, Part Number=RESC0402-18K0-1pct
R24: library part RESC0603-4K70-1pct, "RES 4.70K OHM 1% 1/10W 0603", Manufacturer 1=Yageo, Manufacturer 2="Stackpole Electronics", Manufacturer 3="Vishay Dale", Manufacturer 4="Panasonic Electronic Components", Manufacturer Part Number 1=RC0603FR-074K7L, Manufacturer Part Number 2=RMCF0603FT4K70, Manufacturer Part Number 3=CRCW06034K70FKEA, Manufacturer Part Number 4=ERJ-3EKF4701V, Ohms=4700, Part Number=RESC0603-4K70-1pct
U1: library part BUF802IRGTR, "WIDE-BANDWIDTH JFET BUFFER", Manufacturer="Texas Instruments", Supplier Part Number 1=296-BUF802IRGTRCT-ND, Manufacturer Part Number=BUF802IRGTR, Pricing 1="1=5.06, 10=4.541, 25=4.2928, 100=3.7206, 250=3.5298, 500=3.16728, 1000=2.88 (USD)", Stock 1=1253, Supplier 1=Digi-Key, Supplier 2=Mouser, Supplier Part Number 2=595-BUF802IRGTR
U2: library part OPA140AIDR, "IC OPAMP JFET 1 CIRCUIT 8SOIC", Case/Package=D, Input Bias Current=10pA, Input Offset Voltage (Vos)=30uV, Manufacturer="Texas Instruments", Max Dual Supply Voltage=18V, Max I/O Voltage=120uV, Max Operating Temperature=125°C, Max Supply Voltage=36V, Min Dual Supply Voltage=2.25V, Min Operating Temperature=-40°C, Min Supply Voltage=4.5V, Nominal Supply Current=2mA, Operating Supply Current=1.8mA, Output Current=36mA, Package Quantity=2500, Power Supply Rejection Ratio (PSRR)=140dB, Supplier Part Number 1=296-43606-6-ND, Voltage Gain=126dB, Common Mode Rejection Ratio=126dB, ComponentLink1Description=https://datasheet.ciiva.com/14459/sbos498a-14459066.pdf?src-supplier=Avnet, ComponentLink1URL=https://datasheet.ciiva.com/14459/sbos498a-14459066.pdf?src-supplier=Avnet, ComponentLink2Description=https://datasheet.ciiva.com/1815/opa140-1815515.pdf?src-supplier=Digi-Key, ComponentLink2URL=https://datasheet.ciiva.com/1815/opa140-1815515.pdf?src-supplier=Digi-Key, Contact Plating=Gold, Gain Bandwidth Product=11MHz, Lead Free="Lead Free", Manufacturer Part Number=OPA140AIDR, Nominal Gain Bandwidth Product=11MHz, Number of Channels=1, Number of Circuits=1, Number of Elements=1, Number of Pins=8, Operating Supply Voltage=18V, Output Current per Channel=36mA, Packaging="Tape and Reel", Pricing 1="1=4.01, 10=3.606, 25=3.4088, 100=2.9542, 250=2.80276, 500=2.5149, 1000=2.121 (USD)", Radiation Hardening=No, RoHS Compliant=Yes, Series=-, Slew Rate=20V/µs, Stock 1=3434, Supplier 1=Digi-Key, Supplier 2=Mouser, Supplier Part Number 2=595-OPA140AIDR, Supply Current=2mA, Technology=BIFET, Unity Gain Bandwidth Product=11MHz
U3: library part TPS7A3901DSCR, "IC REG LINEAR POS/NEG ADJ 10WSON", Dropout Voltage=500mV, Manufacturer="Texas Instruments", Max Input Voltage=33V, Max Operating Temperature=125°C, Max Output Voltage=-30V, Max Supply Current=904uA, Min Operating Temperature=-40°C, Min Output Voltage=0V, Output Current=150mA, Power Supply Rejection Ratio (PSRR)=69dB, Quiescent Current=150uA, Supplier Part Number 1=296-TPS7A3901DSCRCT-ND, ComponentLink1Description=http://www.ti.com/lit/ds/symlink/tps7a39.pdf?src-supplier=Digi-Key, ComponentLink1URL=http://www.ti.com/lit/ds/symlink/tps7a39.pdf?src-supplier=Digi-Key, ComponentLink2Description=http://www.ti.com/general/docs/suppproductinfo.tsp?distId=10&amp;gotoUrl=http%3A%2F%2Fwww.ti.com%2Flit%2Fgpn%2Ftps7a39&src-supplier=Digi-Key, ComponentLink2URL=http://www.ti.com/general/docs/suppproductinfo.tsp?distId=10&amp;gotoUrl=http%3A%2F%2Fwww.ti.com%2Flit%2Fgpn%2Ftps7a39&src-supplier=Digi-Key, Copyright="Copyright (C) 2022 Ultra Librarian. All rights reserved.", Manufacturer_Part_Number=TPS7A3901DSCR, Manufacturer Part Number=TPS7A3901DSCR, Mfr_Name="Texas Instruments", Mount="Surface Mount", Number of Regulators=2, Output Type=Adjustable, Packaging="Cut Tape", RefDes=RefDes, Series=-, Stock 1=0, Supplier 1=Digi-Key, Supplier 2=Mouser, Supplier Part Number 2=595-TPS7A3901DSCR, Type=DEV
U4: library part LTC3261EMSE, "IC REG CHARG PUMP INV 12MSOP", Case/Package=SOP, Manufacturer="Analog Devices / Linear Technology", Manufacturer_Part_Number=ltc3261emse#pbf, Manufacturer Part Number=LTC3261EMSE#TRPBF, Max Input Voltage=32V, Max Operating Temperature=125°C, Max Output Current=100mA, Mfr_Name="Linear Technology", Min Input Voltage=4.5V, Min Operating Temperature=-40°C, Operating Supply Current=60uA, Output Voltage=-32V, Package Quantity=2500, Supplier Part Number 1=LTC3261EMSE#TRPBFCT-ND, Switching Frequency=500kHz, ComponentLink1Description=http://components.arrow.com/part/dataview/53470050S89425N7433?src-supplier=Arrow+Electronics, ComponentLink1URL=http://components.arrow.com/part/dataview/53470050S89425N7433?src-supplier=Arrow+Electronics, ComponentLink2Description=http://cds.linear.com/docs/en/datasheet/3261fb.pdf?src-supplier=Digi-Key, ComponentLink2URL=http://cds.linear.com/docs/en/datasheet/3261fb.pdf?src-supplier=Digi-Key, ComponentLink3Description=http://www.linear.com/docs/44087?src-supplier=Digi-Key, ComponentLink3URL=http://www.linear.com/docs/44087?src-supplier=Digi-Key, Copyright="Copyright (C) 2022 Ultra Librarian. All rights reserved.", Lead Free="Lead Free", Max Supply Voltage=32V, Min Supply Voltage=4.5V, Number of Outputs=1, Number of Pins=12, Output Current=100mA, Output Type=Adjustable, Packaging="Tape and Reel", RefDes=RefDes, RoHS Compliant=Yes, Series=-, Stock 1=0, Supplier 1=Digi-Key, Supplier 2=Mouser, Supplier 3=Newark, Supplier Part Number 2=584-LTC3261EMSETRPBF, Supplier Part Number 3=50AK2864, Synchronous Rectifier=No, Type=DEV

## Via types
v1: diameter 0.457/0/0/0.457 (per signal layer), hole 0.254, Top to Bottom, tented both sides, 259 vias
v2: diameter 0.457/0/0.457/0.457 (per signal layer), hole 0.254, Top to Bottom, tented both sides, 3 vias

## Nets (pads, with @x,y where several pads share a name; then routed paths per layer and width w, separated by ;. In a path a pad name is that pad's centre, name@x,y a point inside that pad or via, vN(x,y) a via of type N, cw(c..) or ccw(c..) an arc to the next point about the centre after c; other vN are vias at no path point)
GND: C3.2 C9.2 C10.2 C11.1 C12.2 C13.1 C14.2 C15.1 C16.2 C17.1 C18.2 C19.1 C20.2 C21.1 C22.2 C23.1 C24.2 C25.2 D2.2 J2.1 J3.2 J4.2 J4.3 J5.1 R4.2 R8.2 R13.3 R22.2 U1.17 U3.4 U3.11 U4.1 U4.2 U4.3 U4.11 U4.12 U4.EPAD | length 3.5
  Top w0.2: R4.2 7.967,17.853 J5.1 ; U3.4 U3.11@37.2,7.15
  other v1: 19.3,0.7 20.3,0.7 21.3,0.7 22.3,0.7 23.3,0.7 24.3,0.7 25.3,0.7 26.3,0.7 27.3,0.7 28.3,0.7 29.3,0.7 30.3,0.7 31.3,0.7 32.3,0.7 33.3,0.7 34.3,0.7 35.3,0.7 36.3,0.7 37.3,0.7 38.3,0.7 39.3,0.7 40.3,0.7 41.3,0.7 42.3,0.7 43.3,0.7 44.3,0.7 45.3,0.7 46.3,0.7 47.3,0.7 48.3,0.7 49.3,0.7 50.3,0.7 51.3,0.7 52.3,0.7 53.3,0.7 54.3,0.7 55.3,0.7 56.3,0.7 57.3,0.7 58.3,0.7 59.3,0.7 60.3,0.7 61.3,0.7 62.3,0.7 63.3,0.7 64.3,0.7 65.3,0.7 66.3,0.7 67.3,0.7 68.3,0.7 69.3,0.7 69.3,1.7 22.25,1.825 69.3,2.7 23.175,2.775 14.35,3 15.35,3 16.35,3 17.35,3 18.35,3 13.643,3.707 69.3,3.7 12.936,4.414 69.3,4.7 12.229,5.121 27.725,5.45 43.85,5.7 45.15,5.7 69.3,5.7 11.522,5.828 28.675,6.425 10.814,6.536 48.45,6.65 69.3,6.7 10.107,7.243 37.125,7.652 38.275,7.65 48.45,7.65 69.3,7.7 9.4,7.95 11.45,8 8.693,8.657 69.3,8.7 10.45,9 11.45,9 18.375,9 7.975,9.275 43.85,9.6 45.15,9.6 69.3,9.7 9.45,10 10.45,10 11.45,10 18.375,10 69.3,10.7 29,10.875 8.45,11 9.45,11 10.45,11 11.45,11 18.375,11 23.35,11.75 15,13.5 65.555,14.436 66.825,14.436 68.095,14.436 69.365,14.436 22.514,14.633 24.038,14.633 25.562,14.633 27.086,14.633 28.61,14.633 30.134,14.633 31.658,14.633 33.182,14.633 34.706,14.633 36.23,14.633 37.754,14.633 39.278,14.633 40.802,14.633 42.326,14.633 43.85,14.633 45.374,14.633 46.898,14.633 48.422,14.633 49.946,14.633 51.47,14.633 52.994,14.633 54.518,14.633 56.042,14.633 57.566,14.633 59.09,14.633 60.614,14.633 62.138,14.633 63.662,14.633 21.934,15.967 23.458,15.967 24.982,15.967 26.506,15.967 28.03,15.967 29.554,15.967 31.078,15.967 32.602,15.967 34.126,15.967 35.65,15.967 37.174,15.967 38.698,15.967 40.222,15.967 41.746,15.967 43.27,15.967 44.794,15.967 46.318,15.967 47.842,15.967 49.366,15.967 50.89,15.967 52.414,15.967 53.938,15.967 55.462,15.967 56.986,15.967 58.51,15.967 60.034,15.967 61.558,15.967 63.082,15.967 11.45,16 18.508,16 65.555,16.164 66.825,16.164 68.095,16.164 69.365,16.164 11.45,17 18.508,17 11.45,18 18.508,18 11.45,19 18.058,19.3 19.058,19.3 20.058,19.3 21.058,19.3 22.058,19.3 23.058,19.3 24.058,19.3 25.058,19.3 26.058,19.3 27.058,19.3 28.058,19.3 29.058,19.3 30.058,19.3 31.058,19.3 32.058,19.3 33.058,19.3 34.058,19.3 35.058,19.3 36.058,19.3 37.058,19.3 38.058,19.3 39.058,19.3 40.058,19.3 41.058,19.3 42.058,19.3 43.058,19.3 44.058,19.3 45.058,19.3 46.058,19.3 47.058,19.3 48.058,19.3 49.058,19.3 50.058,19.3 51.058,19.3 52.058,19.3 53.058,19.3 54.058,19.3 55.058,19.3 56.058,19.3 57.058,19.3 58.058,19.3 59.058,19.3 60.058,19.3 61.058,19.3 62.058,19.3 63.058,19.3
NetC1_1: C1.1 C5.2 R3.2 R4.1 | length 3.3
  Top w0.2: R4.1 R3.2 9,14.983 C5.2 C1.1
NetC1_2: C1.2 R2.1 | length 1.1
  Top w0.2: C1.2 R2.1
NetC2_1: C2.1 R11.1 R12.1 U2.2 | length 8.3
  Top w0.2: R11.1 R12.1 C2.1 ; U2.2@19.55,7.025 U2.2@19.55,7.21 ; C2.1@19.55,11.633 C2.1 ; U2.2 U2.2@19.55,7.21 ; U2.2@19.55,7.21 19.225,7.21 19.067,7.368 19.067,9.364 19.55,9.847 19.667,9.965 C2.1
NetC2_2: C2.2 R15.2 U2.6 | length 8.5
  Top w0.203: C2.2 20.667,11.715 R15.2 20.667,9.833 24.56,5.94 U2.6
NetC3_1: C3.1 R15.1 U1.4 | length 11.9
  Top w0.2: C3.1 21.668,10.685 R15.1 v2(22.35,10.65)
  Top w0.203: v2(13.533,12.033) U1.4@13.533,12.75
  Signal/Power w0.2: 18.429,12.033 20.967,12.033 v2(22.35,10.65)
  Signal/Power w0.203: v2(13.533,12.033) 18.429,12.033
NetC4_1: C4.1 R1.2 R3.1 R6.1 | length 3.3
  Top w0.2: R1.2 R6.1 C4.1 7.9,14.983 R3.1
NetC4_2: C4.2 C5.1 | length 1.1
  Top w0.2: C4.2 C5.1
NetC6_1: C6.1 R20.2 R22.1 U3.9 | length 0.3
  Top w0.2: R22.1@42.182,8.15 R22.1
NetC7_1: C7.1 U4.7 U4.8
NetC7_2: C7.2 U4.5 U4.6
NetC8_1: C8.1 R21.1 R23.1 U3.7
NetC9_1: C9.1 U3.3 | length 1.2
  Top w0.2: C9.1@35.225,7.425 35.45,7.65 U3.3
NetD1_1: D1.1 J4.1
NetD2_1: D2.1 R24.2 | length 1.7
  Top w0.2: D2.1 R24.2
NetR2_2: R2.2 R10.1 U1.2 | length 2.4
  Top w0.2: R2.2 R10.1 12.533,13.75 U1.2
NetR6_2: R6.2 R8.1 R9.1 | length 15.8
  Top w0.2: R6.2 6.8,11.525 12.425,5.9 R9.1 R8.1
NetR9_2: R9.2 U2.3 | length 1.6
  Top w0.2: R9.2 20.185,5.9 U2.3
NetR10_2: R10.2 U1.3 | length 1.3
  Top w0.2: R10.2 12.532,13.25 U1.3
NetR11_2: R11.2 R19.1 U1.11 | length 2.4
  Top w0.2: U1.11@16.479,13.75 17.475,13.75 17.675,13.95 R11.2@17.675,12.85
NetR12_2: R12.2 R13.1 R13.2 | length 8.3
  Top w0.2: R12.2 23.388,12.85 24.238,12 R13.2 25.74,12 26.89,13.15 R13.1
NetR16_1: R16.1 U1.7 | length 1.2
  Top w0.2: U1.7 15.25,10.831 15.256,10.825 R16.1@15.258,10.825
NetR17_1: R17.1 U1.15 U1.16
NetR18_1: R18.1 U1.13 U1.14
NetR23_2: R23.2 U3.8
OUT: J3.1 R19.2 | length 51.3
  Top w0.343: R19.2 19.423,13.95 ccw(c19.423,14.377) 19.725,14.075 20.284,14.634 cw(c21.892,13.027) 21.892,15.3 62.9,15.3 68.075,15.3 J3.1
TIP: J1.1 R1.1 | length 3.4
  Top w0.2: J1.1 3.023,13.018 R1.1
V+: C22.1 C24.1 D1.3 U3.1 U3.2 U4.9 U4.10 | length 7.6
  Top w0.4: U4.10 48.125,10.3 48.775,10.3 U4.9 C24.1@48.775,11.8
  Top w0.5: C24.1@49.25,11.8 D1.3
  other v1: 36.1,11.925 36.8,11.925 36.1,12.625 36.8,12.625 48.875,12.775 49.575,12.775 48.9,13.475 49.575,13.475
V-: C23.2 C25.1 U3.5 U4.4 | length 2.3
  Top w0.4: C25.1@48.775,2.7 U4.4
  other v1: 50.325,2.3 51.025,2.3 36.1,2.65 36.8,2.65 50.325,3 51.025,3 36.1,3.35 36.8,3.35
VCC: C6.2 C10.1 C12.1 C14.1 C16.1 C18.1 C20.1 R17.2 R20.1 R24.1 U1.1 U1.12 U2.7 U2.8 U3.10 | length 0.9
  Top w0.203: R24.1 v1(26.85,17.725)
  other v1: 28.675,8.225 27.725,9.175 39.95,10.1 40.717,10.1 41.483,10.1 42.25,10.1 13.5,19 14.25,19 15,19 15.75,19 16.5,19
VEE: C8.2 C11.2 C13.2 C15.2 C17.2 C19.2 C21.2 R16.2 R18.2 R21.2 U1.5 U1.6 U1.8 U1.9 U1.10 U2.4 U3.6 | length 15.2
  Top w0.203: R18.2 v2(15.55,17.85)
  Signal/Power w0.203: v2(15.55,17.85) 14.4,16.7 14.4,12.4 21.725,12.4 22.6,11.525
  other v1: 20.45,1.825 19.475,2.775 39.95,5.1 40.717,5.1 41.483,5.1 42.25,5.1 13.5,8.075 14.25,8.075 15,8.075 15.75,8.075 16.5,8.075
pads on no net: D1.2 U2.1 U2.5
copper on no net: | length 0.6
  Top w0.2: 19.667,8.48 20.225,8.48

## Polygon pours and split planes (outlines as drawn)
GND on Top "GND_L01_P110" (solid, pour order 110): 7.35,0 70,0 70,20 11.05,20 6.05,20 6.05,17.35 11.15,17.35 11.15,15.5 12.9,15.5 12.9,11.7 7.35,11.7
VEE on Top "VEE_L01_P035" (solid, pour order 35): 13.05,13.375 17,13.375 17,7.6 13.05,7.6
VCC on Top "VCC_L01_P034" (solid, pour order 34): 13.05,14.125 13.05,20 17,20 17,14.125
V- on Top "V-_L01_P108" (solid, pour order 108): 48.575,3.475 48.575,1.925 51.4,1.925 51.4,3.475
V- on Top "V-_L01_P106" (solid, pour order 106): 35.775,6.775 36.6,6.775 36.6,5.85 37.15,5.85 37.15,2.3 35.775,2.3
V+ on Top "V+_L01_P104" (solid, pour order 104): 49.925,10.825 49.925,13.8 48.575,13.8 48.575,10.825
V+ on Top "V+_L01_P102" (solid, pour order 102): 35.775,8.025 36.6,8.025 36.6,9.45 37.125,9.45 37.125,13 35.775,13
NetC6_1 on Top "NETC6_1_L01_P096" (solid, pour order 96): 38.8,8.675 42.75,8.675 42.75,8.05 38.8,8.05